# Altium PCB env_sensing_pcb.PcbDoc
Units mil, origin at the board's own origin, x right, y up, seen from the top; angles counter-clockwise.
Board outline 1381 x 1336 mil, 2 copper layers (Top Layer, Bottom Layer); 47 components, 37 nets, 205 pads, 131 vias.
Unrouted connection lines stored in the file: 1.
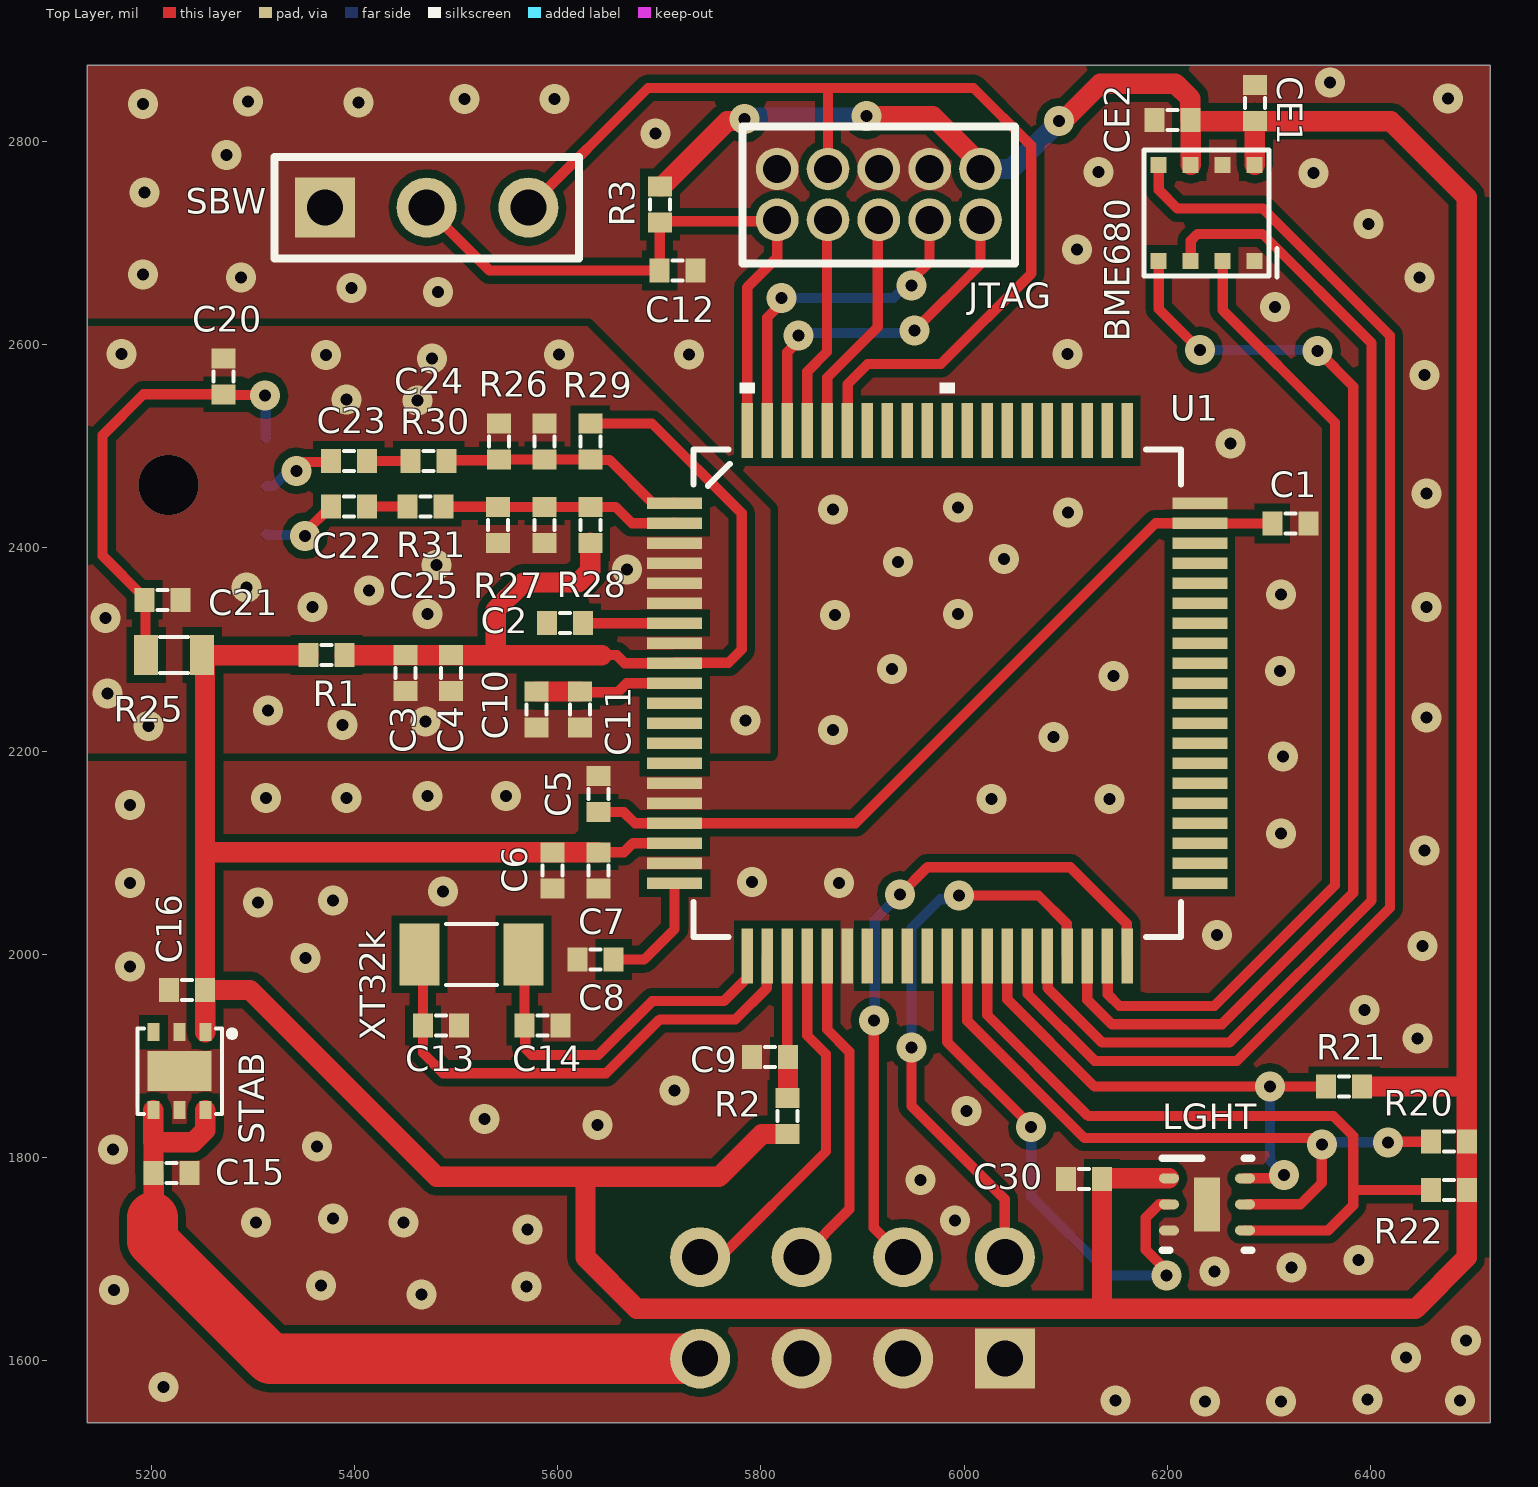
[diagram p0: Top Layer view]
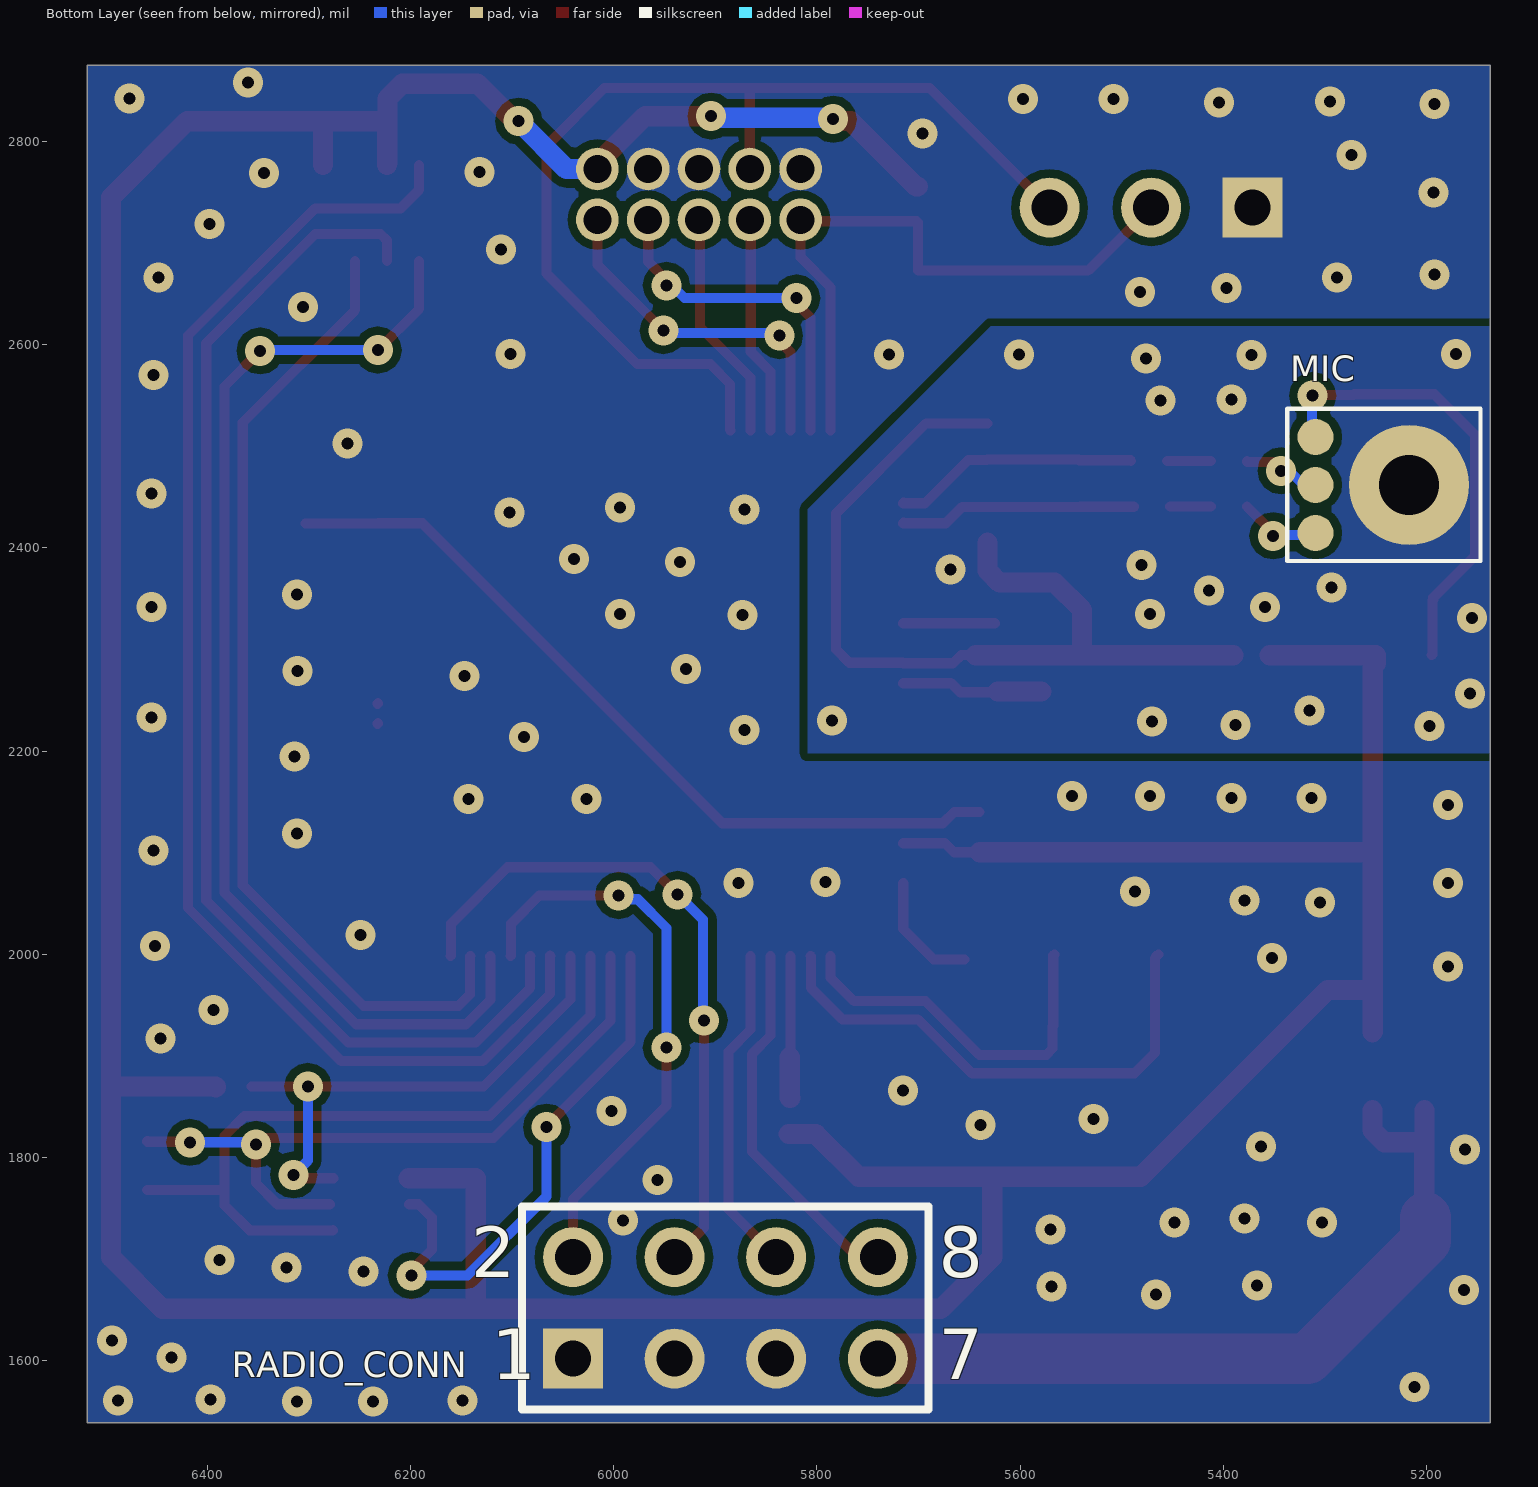
[diagram p1: Bottom Layer view, seen from below]

## Layer stack, top to bottom
Top Solder: solder mask 0.4, Solder Resist, Dk 3.5
Top Layer: signal copper 1.4
Dielectric 1: dielectric 12.6, FR-4, Dk 4.8
Bottom Layer: signal copper 1.4
Bottom Solder: solder mask 0.4, Solder Resist, Dk 3.5

## Board outline
5137,2875 6518,2875 6518,1539 5137,1539

## Design rules (kind name [scope] priority, off if disabled: settings)
Clearance [All] p1: gap=8 ignorepadtopadclearanceinfootprint=FALSE except(0: Arc-Hole Track-Hole SMDPad-Hole THPad-Hole Via-Hole Fill-Hole Poly-Hole Region-Hole Text-Hole)
PolygonConnect [All] p1: connectstyle=Direct reliefconductorwidth=10 reliefentries=4 polygonreliefangle="90 Angle" airgapwidth=10
RoomDefinition uC [InComponentClass('uC')] p1: confinementstyle=ConfineOut formatcopy=TRUE lockcomponents=FALSE outline 7236,2303 8561,2303 8561,3013 7236,3013
RoomDefinition mems [InComponentClass('mems')] p2: confinementstyle=ConfineOut formatcopy=TRUE lockcomponents=FALSE outline 6876,2743 7101,2743 7101,3013 6876,3013
RoutingVias [All] p1: holewidth=11.81 width=29.53 viastyle="Through Hole" minholewidth=11.81 minwidth=29.53 maxholewidth=28 maxwidth=50
SolderMaskExpansion [All] p1: expansion=4
Width [All] p1: maxlimit=50 minlimit=10 preferedwidth=10 minimp=50.000000 maximp=50.000000 favimp=50.000000
30 further rules are at their usual default settings.

## Classes and differential pairs
component class uC: C1 C2 C3 C4 C5 C6 C7 C8 C9 C10 C11 C12 C13 C14 C15 C16 LORA_CONN R1 R2 R3 RADIO_CONN SBW STAB U1 XT32k
component class mems: BME680 C20 C21 C22 C23 C24 C25 C30 CE1 CE2 LGHT MIC R20 R21 R22 R25 R26 R27 R28 R29 R30 R31

## Components (designator, comment, footprint, x,y, rotation, side; value= is the part's Value field where it differs from the comment)
BME680 "" BME680 6299.96,2791.65 r270 top
C1 "C" 402 6321,2424 r180 top
C2 "C" 402 5607,2325.91 r0 top
C3 "C" 402 5450,2276.72 r90 top
C4 "C" 402 5495,2276.72 r90 top
C5 "C" 402 5640,2157.72 r270 top
C6 "C" 402 5595,2082.72 r90 top
C7 "C" 402 5640,2082.72 r90 top
C8 "C" 402 5637.28,1995 r0 top
C9 "C" 402 5809,1899 r0 top
C10 "C" 402 5579,2241 r90 top
C11 "C" 402 5622,2241 r90 top
C12 "C" 402 5718,2673 r180 top
C13 "C" 402 5485,1930 r180 top
C14 "C" 402 5585,1930 r180 top
C15 "10u" 402 5220,1785 r180 top
C16 "10u" 402 5235,1965 r0 top
C20 "C" 402 5271,2569 r270 top
C21 "C" 402 5211,2349 r180 top
C22 "C" 402 5394.28,2440.72 r180 top
C23 "C" 402 5394.28,2485.72 r180 top
C24 "C" 402 5542,2504.72 r90 top
C25 "C" 402 5541.19,2422.72 r90 top
C30 "C" 402 6118,1779 r0 top
CE1 "C" 402 6286,2838 r270 top
CE2 "C" 402 6205,2821 r0 top
JTAG "Cortex Debug Connector" JTAG_HEADER 6016,2773 r180 top
LGHT "OPT3001DNPR" DNP0006A 6239,1754 r0 top value=Value
MIC "ICS-40730" ICS-40730 5217,2462 r180 bottom
R1 "R" 402 5372.28,2294.53 r0 top
R2 "R" 402 5826,1841 r90 top
R3 "R" 402 5700.6,2738 r90 top
R20 "R" 402 6477,1816 r0 top
R21 "R" 402 6374,1870 r0 top
R22 "R" 402 6477,1768 r0 top
R25 "R" 603 5222.44,2294.53 r180 top
R26 "R" 402 5587,2504.72 r90 top
R27 "R" 402 5587,2422.72 r90 top
R28 "R" 402 5632,2422.72 r90 top
R29 "R" 402 5632,2504.72 r90 top
R30 "R" 402 5473,2485.72 r0 top
R31 "R" 402 5470,2440.72 r0 top
RADIO_CONN "Header 4X2" HDR2X4 6040,1602 r180 bottom
SBW "" HDR1X3 5371,2735 r0 top
STAB "LP5912" WSON-6 5227.56,1885 r270 top
U1 "MSP430F6726_PN_8" PN80-L 5973.5,2257.01 r0 top value=Value
XT32k "CRYST_32k768" "CRYST 32.768 kHz" 5515,2000 r0 top

## Footprints (in the part's own frame and the unit in brackets; to place one, negate y for a bottom-side part, rotate by r counter-clockwise, add the part's x,y. Pads: shape width x height; smd on the part's side, far side on the other; paste and mask are expansions set on the pad)
402 [mm]
  rect 0.5x0.6 smd: 1(-0.45,0) 2(0.45,0)
  silkscreen extent -0.13,-0.25 0.13,0.25
603 [mm]
  rect 0.6x1 smd: 1(-0.7,0) 2(0.7,0)
  silkscreen extent -0.35,-0.45 0.35,0.45
BME680 [mm]
  rect 0.4x0.4 smd: 1(2.772,-0.355) 2(2.772,-1.155) 3(2.772,-1.955) 4(2.772,-2.755) 5(0.372,-2.755) 6(0.372,-1.955) 7(0.372,-1.155) 8(0.372,-0.355)
  silkscreen extent 0,-3.12 3.17,0.2
"CRYST 32.768 kHz" [mm]
  rect 1x1.55 smd: 1(-1.3,0) 2(1.3,0)
  silkscreen extent -0.64,-0.76 0.64,0.76
DNP0006A [mm]
  oval 0.5x0.25 smd paste-0.102 mask+0.051: 1(-0.95,0.65) 2(-0.95,0) 3(-0.95,-0.655) 4(0.95,-0.65) 5(0.95,0) 6(0.95,0.65)
  rect 0.65x1.35 smd paste-0.662 mask+0.051: 7(0,0)
  silkscreen extent -1.12,-1.15 1.12,1.15, body extent 0,0 0.25,0.25, height 0.25
HDR1X3 [mm] "Connector; Header; 3 Position"
  rect 1.5x1.5 hole 0.9: 1(0,0)
  round 1.5 hole 0.9: 2(2.54,0) 3(5.08,0)
  silkscreen extent -1.27,-1.27 6.35,1.27
HDR2X4 [mm] "Connector; Header; 4x2 Position"
  rect 1.5x1.5 hole 0.9: 1(0,0)
  round 1.5 hole 0.9: 2(0,2.54) 3(2.54,0) 4(2.54,2.54) 5(5.08,0) 6(5.08,2.54) 7(7.62,0) 8(7.62,2.54)
  silkscreen extent -1.27,-1.27 8.89,3.81
ICS-40730 [mm]
  round 0.9 smd: 1(-2.34,1.2) 2(-2.34,0) 3(-2.34,-1.2)
  round 3 smd: 4(0,0)
  silkscreen extent -3.05,-1.91 1.78,1.91
JTAG_HEADER [mm]
  round 1.067 hole 0.7: 1(0,0) 2(0,1.27) 3(1.27,0) 4(1.27,1.27) 5(2.54,0) 6(2.54,1.27) 7(3.81,0) 8(3.81,1.27) 9(5.08,0) 10(5.08,1.27)
  silkscreen extent -0.86,-1.07 5.94,2.36
PN80-L [mil]
  rect 54x11 smd: 1(-258.5,187.01) 2(-258.5,167.32) 3(-258.5,147.64) 4(-258.5,127.95) 5(-258.5,108.27) 6(-258.5,88.58) 7(-258.5,68.9) 8(-258.5,49.21) 9(-258.5,29.53) 10(-258.5,9.84) 11(-258.5,-9.84) 12(-258.5,-29.53) 13(-258.5,-49.21) 14(-258.5,-68.9) 15(-258.5,-88.58) 16(-258.5,-108.27) 17(-258.5,-127.95) 18(-258.5,-147.64) 19(-258.5,-167.32) 20(-258.5,-187.01) 41(258.5,-187.01) 42(258.5,-167.32) 43(258.5,-147.64) 44(258.5,-127.95) 45(258.5,-108.27) 46(258.5,-88.58) 47(258.5,-68.9) 48(258.5,-49.21) 49(258.5,-29.53) 50(258.5,-9.84) 51(258.5,9.84) 52(258.5,29.53) 53(258.5,49.21) 54(258.5,68.9) 55(258.5,88.58) 56(258.5,108.27) 57(258.5,127.95) 58(258.5,147.64) 59(258.5,167.32) 60(258.5,187.01)
  rect 11x54 smd: 21(-187.01,-258.5) 22(-167.32,-258.5) 23(-147.64,-258.5) 24(-127.95,-258.5) 25(-108.27,-258.5) 26(-88.58,-258.5) 27(-68.9,-258.5) 28(-49.21,-258.5) 29(-29.53,-258.5) 30(-9.84,-258.5) 31(9.84,-258.5) 32(29.53,-258.5) 33(49.21,-258.5) 34(68.9,-258.5) 35(88.58,-258.5) 36(108.27,-258.5) 37(127.95,-258.5) 38(147.64,-258.5) 39(167.32,-258.5) 40(187.01,-258.5) 61(187.01,258.5) 62(167.32,258.5) 63(147.64,258.5) 64(127.95,258.5) 65(108.27,258.5) 66(88.58,258.5) 67(68.9,258.5) 68(49.21,258.5) 69(29.53,258.5) 70(9.84,258.5) 71(-9.84,258.5) 72(-29.53,258.5) 73(-49.21,258.5) 74(-68.9,258.5) 75(-88.58,258.5) 76(-108.27,258.5) 77(-127.95,258.5) 78(-147.64,258.5) 79(-167.32,258.5) 80(-187.01,258.5)
  silkscreen extent -240,-240 240,306
WSON-6 [mm]
  rect 0.45x0.3 smd: 1(-0.975,0.65) 2(-0.975,0) 3(-0.975,-0.65) 4(0.975,-0.65) 5(0.975,0) 6(0.975,0.65)
  rect 1x1.6 smd: 7(0,0)
  silkscreen extent -1.07,-1.04 1.07,1.4

## Part data
BME680: library part BME680
C1 C2 C3 C4 C5 C6 C7 C8 C9 C10 C11 C12 C13 C14 C20 C21 C22 C23 C24 C25 C30 CE1 CE2: "Capacitor"
C15 C16: library part C, "Capacitor"
LGHT: "Imported", Manufacturer="Texas Instruments", PartNumber=OPT3001DNP, CompType=IC, MountType=SMT, PackageReference=DNP0006A, PIN_COUNT=7, RefDes=RefDes, RoHS=Y, TYPE=TYPE
R1 R2 R3 R20 R21 R22 R25 R26 R27 R28 R29 R30 R31: "Resistor"
RADIO_CONN: "Header, 4-Pin, Dual row", LatestRevisionDate=17-Jul-2002, LatestRevisionNote="Re-released for DXP Platform.", Publisher="Altium Limited"
SBW: library part "Header 3", "Header, 3-Pin", LatestRevisionDate=17-Jul-2002, LatestRevisionNote="Re-released for DXP Platform.", Publisher="Altium Limited"
U1: "Imported", Manufacturer="Texas Instruments", Manufacturer_Part_Number=msp430f6726_pn_80, PACKAGE_DESIGNATOR=PN, Datasheet_URL=http://www.ti.com/lit/gpn/MSP430F6726, FAMILY_NAME="6 Series with LCD", GENERIC_PART_NUMBER=MSP430F6726, INDUSTRY_STD_PKG_TYPE=LQFP, PIN_COUNT=80, RefDes=RefDes, TYPE=Type, Vendor="Texas Instruments"

## Via types
v1: diameter 29.53, hole 11.81, Top Layer to Bottom Layer, 130 vias
v2: diameter 59.06/25 (per signal layer), hole 59.06, Top Layer to Bottom Layer, tented both sides, 1 vias

## Nets (pads, with @x,y where several pads share a name; then routed paths per layer and width w, separated by ;. In a path a pad name is that pad's centre, name@x,y a point inside that pad or via, vN(x,y) a via of type N, cw(c..) or ccw(c..) an arc to the next point about the centre after c; other vN are vias at no path point)
AGND: C2.1 C3.1 C4.1 C10.1 C11.1 C20.1 C21.1 C24.2 C25.1 MIC.4 R26.2 R27.1 U1.3 U1.4 U1.5 U1.6 U1.8
  other v1: 5197,2225 5388,2226 5470,2229 5785,2230 5315,2240 5157,2257 5155,2331 5472,2335 5358.72,2342 5414,2358 5293.59,2361 5668.37,2379 5480.54,2383 5462,2545 5392,2546 5476,2586.72 5372,2590 5601,2590.28 5170.8,2591
  other v2: 5217,2462
AUXVCC3: C9.2 R2.2 U1.23 | length 143.8
  Top Layer w10: R2.2@5823.72,1861 R2.2 ; U1.23 5825.86,1899.54 C9.2@5826.56,1898.84
  Top Layer w20: R2.2 5826.4,1858.72 5826.56,1858.87 C9.2@5826.56,1898.84
AVCC: C3.2 C4.2 R1.2 R28.1 R29.2 U1.9 | length 900.4
  Top Layer w10: R29.2 5692.67,2522.43 5781,2434.1 5781,2300 5768.04,2287.04 5715.5,2287.04 U1.9 5665.99,2286.54 5658,2294.53 5643.47,2294.53
  Top Layer w20: R1.2 5539,2294.53 ; R28.1 5632,2377.72 5620.28,2366 5566,2366 5539,2339 5539,2294.53 ; 5643.47,2294.53 5539,2294.53
BME680_CSB: BME680.2 U1.39 | length 976
  Top Layer w10: U1.39 6141.32,1998.01 6141.32,1960.68 6152.86,1949.14 6246.14,1949.14 6365,2068 6365,2523.56 6254.5,2634.06 BME680.2
BME680_SCK: BME680.4 U1.38 | length 1138.1
  Top Layer w10: U1.38@6121.64,1998.01 U1.38 6121.14,1955.41 6145.4,1931.14 6253.6,1931.14 6383,2060.54 6383,2559 v1(6348,2594) ; BME680.4 6191.5,2635.29 v1(6232,2594.79)
  Bottom Layer w10: v1(6232,2594.79) 6347.21,2594.79 v1(6348,2594)
BME680_SDI: BME680.3 U1.36 | length 1224.5
  Top Layer w10: U1.36 6082.27,1998.01 6082.27,1966.81 6135.93,1913.14 6261.05,1913.14 6401,2053.09 6401,2601.64 6293.64,2709 6229.5,2709 6223,2702.5 BME680.3
BME680_SDO: BME680.5 U1.35 | length 1359.3
  Top Layer w10: U1.35@6062.58,1999.01 U1.35 6062.58,1998.01 6062.58,1961.04 6128.48,1895.14 6268.51,1895.14 6419,2045.63 6419,2609.09 6294.09,2734 6210,2734 6191.5,2752.5 BME680.5
GND: BME680.1 BME680.7 C1.1 C5.1 C6.1 C7.1 C8.1 C9.1 C12.1 C13.1 C14.1 C15.1 C16.1 C30.1 CE1.1 CE2.1 JTAG.3 JTAG.5 JTAG.9 LGHT.3 LGHT.7 RADIO_CONN.1 RADIO_CONN.3 RADIO_CONN.5 SBW.1 STAB.2 STAB.5 STAB.7 U1.15 U1.16 U1.19 U1.26 U1.60
  other v1: 6237,1560 6311.67,1560 6149,1561 6488,1561 6397,1562 5212,1574 6435,1603 6493.72,1620 5466,1665 5163,1669.59 5569,1673 5367,1674 6246.14,1688 6322,1692 6388,1699 5570,1729 5303,1736.21 5448,1736 5991,1738 5379,1739.85 5957,1778 5162,1808 5363,1811 5639,1832 5527.93,1838 6002.15,1846 5715,1866 6446,1917 6394,1945 5179,1988 5351.88,1996.54 6451.26,2008.25 6249,2019 5305,2051 5379,2053 5487,2062 5179,2070 5877,2070 5791.28,2071 6453,2102 6311.67,2119 5179,2147 6026.75,2153 6143,2153 5313,2154 5392,2154 5472,2156 5549,2156 6314,2194.88 6088,2213.98 5871,2221 6455,2233 6147,2274 6311,2279 5929,2281 5873,2334 5994,2335 6455,2342 6311.67,2354 5934.75,2386 6039,2389 6102.3,2434.99 5871,2438 5994,2439.83 6455,2453.41 6262.16,2503 6453,2570 5729,2590.28 6101.45,2591 6306,2637 5482,2652 5397,2656 5288,2666 6448,2666 5192,2669 6111,2694 6398,2719 5193.28,2750 6344.05,2769.21 6132,2770 5274,2787 5696,2808 5192,2837 5404,2838.35 5295,2839.51 5508,2842 5597,2842 6476.36,2842.44 6360,2858
LGHT_ADD: LGHT.2 U1.31 | length 529.5
  Top Layer w10: U1.31 5983.34,1913.66 6066,1831 v1(6066,1830) ; v1(6199,1684) 6199,1689 6178.76,1709.24 6178.76,1740.76 6192,1754 LGHT.2
  Bottom Layer w10: v1(6066,1830) 6066,1762 6144,1684 v1(6199,1684)
LGHT_INT: LGHT.5 R20.1 U1.32 | length 692.5
  Top Layer w10: U1.32 6003.03,1934.52 6118.31,1819.24 6344.05,1819.24 6351.14,1812.14 v1(6352,1813) 6352,1775 6331,1754 LGHT.5@6279.06,1754 ; v1(6417,1815) 6417.5,1815.5 6458.78,1815.5 R20.1 R20.1@6459.08,1816.2
  Bottom Layer w10: v1(6352,1813) 6354,1815 v1(6417,1815)
LGHT_SCL: LGHT.4 R22.1 U1.33 | length 729.2
  Top Layer w10: U1.33 6022.71,1940.29 6122.24,1840.76 6363.5,1840.76 6383,1821.26 6383,1768 ; LGHT.4 6276.48,1728.33 6358.33,1728.33 6383,1753 6383,1768 ; R22.1 6383,1768
LGHT_SDA: LGHT.6 R21.1 U1.34 | length 525.1
  Top Layer w10: U1.34 6042.4,1955.77 6128.16,1870 v1(6301,1870) R21.1 ; LGHT.6@6276.06,1779.59 LGHT.6@6276.14,1779.67 ; LGHT.6 6276.48,1779.67 6311.67,1779.67 v1(6315,1783)
  Bottom Layer w10: v1(6301,1870) 6301,1797 v1(6315,1783)
MIC_OUT+: C25.2 R27.2 R28.2 R31.2 U1.2 | length 234.8
  Top Layer w10: R31.2 5487.86,2440.57 5541.05,2440.57 C25.2 R27.2 R28.2 5656.9,2440.43 5673,2424.33 U1.2 U1.2@5714.5,2424.83
MIC_OUT-: C24.1 R26.1 R29.1 R30.2 U1.1 | length 243.3
  Top Layer w10: R30.2 5491.36,2486.36 5541.36,2486.36 C24.1 R26.1 R29.1 5632.48,2486.52 5651,2486.52 5693.5,2444.02 U1.1 U1.1@5714.5,2444.52
NetC2_2: C2.2 U1.7 | length 90.3
  Top Layer w10: C2.2 U1.7
NetC8_2: C8.2 U1.20 | length 117.4
  Top Layer w10: C8.2 5685,1995 5715,2025 U1.20
NetC20_2: C20.2 C21.2 MIC.1 R25.2 | length 453.7
  Top Layer w10: R25.2 5194.08,2295.33 5194.08,2348.2 C21.2 5193.28,2350.97 5152,2392.25 5152,2511 5192.28,2551.28 C20.2 5271.64,2550.64 5311.36,2550.64 v1(5312,2550)
  Bottom Layer w10: v1(5312,2550) 5312.56,2549.44 5312.56,2508.81 MIC.1@5313.13,2508.24
NetC22_1: C22.1 R31.1 | length 40.3
  Top Layer w10: C22.1 R31.1
NetC22_2: C22.2 MIC.3 | length 77.9
  Top Layer w10: v1(5351,2412) 5351,2415.15 C22.2
  Bottom Layer w10: MIC.3@5313.13,2413.76 5314,2412.88 5350.12,2412.88 v1(5351,2412)
NetC23_1: C23.1 R30.1 | length 43.3
  Top Layer w10: C23.1 R30.1
NetC23_2: C23.2 MIC.2 | length 74.3
  Top Layer w10: v1(5343,2476) 5351.58,2484.58 5376.57,2484.58 C23.2
  Bottom Layer w10: MIC.2@5313.13,2461 5320.01,2461 5331.27,2472.26 5339.26,2472.26 v1(5343,2476)
PS_VCC: C15.2 RADIO_CONN.7 STAB.4 STAB.6 | length 792.1
  Top Layer w20: 5201,1741 5202.28,1742.28 C15.2 ; STAB.4 5201.97,1815 5202.13,1815 ; C15.2@5202.13,1785 5202.13,1815 ; STAB.6 5253.15,1826.72 5241.43,1815 5202.13,1815
  Top Layer w50: 5201,1741 5201,1718.13 5317.13,1602 RADIO_CONN.7
RADIO_SPI_CLK: RADIO_CONN.2 U1.37 | length 596.6
  Top Layer w10: v1(5948,1908.21) 5948,1851 6040,1759 RADIO_CONN.2 ; v1(5995,2058) 6073.16,2058 6100.95,2030.21 6100.95,1999.01 U1.37
  Bottom Layer w10: v1(5948,1908.21) 5948,2026 5976.26,2054.26 5991.26,2054.26 v1(5995,2058) ; RADIO_CONN.2@6028.32,1682 6040,1693.68 RADIO_CONN.2
RADIO_SPI_MISO: RADIO_CONN.8 U1.24 | length 395.6
  Top Layer w10: RADIO_CONN.8 5760,1702 5864,1806 5864,1901.75 5845.55,1920.21 U1.24
  Bottom Layer w10: RADIO_CONN.8@5744.32,1682 RADIO_CONN.8@5744.32,1710.32
RADIO_SPI_MOSI: RADIO_CONN.6 U1.25 | length 340.7
  Top Layer w10: RADIO_CONN.6 5887,1749 5887,1904.21 5865.23,1925.98 U1.25
  Bottom Layer w10: RADIO_CONN.6@5828.32,1682 RADIO_CONN.6@5844,1682
RADIO_SPI_STE: RADIO_CONN.4 U1.40 | length 668.8
  Top Layer w10: v1(5911,1935) 5911,1731 RADIO_CONN.4 ; v1(5937,2059) 5963.76,2085.76 6104.45,2085.76 6160.01,2030.21 6160.01,1999.01 U1.40
  Bottom Layer w10: v1(5911,1935) 5912,1936 5912,2034 v1(5937,2059)
RST/SBWTDIO: C12.2 JTAG.10 R3.1 SBW.2 U1.80 | length 638.6
  Top Layer w10: SBW.2 5533,2673 C12.2 5700.44,2673.16 5700.44,2720.13 R3.1 5701.96,2721.64 5814.64,2721.64 JTAG.10 5816,2686 5786.49,2656.49 U1.80
TCK: JTAG.4 U1.79 | length 341.4
  Top Layer w10: U1.79 5806.18,2626.89 5820,2640.72 v1(5820,2646) ; v1(5948,2658.5) 5948,2663.78 5966,2681.78 JTAG.4
  Bottom Layer w10: v1(5820,2646) 5930.22,2646 5942.72,2658.5 v1(5948,2658.5)
TDI: JTAG.8 U1.77 | length 216.8
  Top Layer w10: U1.77 5845.55,2573.55 5865,2593 5865,2720 5864,2721 JTAG.8
TDO: JTAG.6 U1.76 | length 228.5
  Top Layer w10: U1.76 5865.23,2567.78 5915,2617.54 5915,2722 JTAG.6
TEST/SBWTCK: JTAG.7 SBW.3 U1.75 | length 1044.7
  Top Layer w10: SBW.3 5688.76,2852.76 5866,2852.76 ; JTAG.7 5866,2852.76 ; U1.75 5885.42,2516.01 5885.42,2561.42 5905,2581 5977,2581 6066,2670 6066,2796 6009.24,2852.76 5866,2852.76
TMS: JTAG.2 U1.78 | length 350.2
  Top Layer w10: U1.78 5825.86,2592.67 5837,2603.81 v1(5837,2609.09) ; v1(5951,2614) 6016,2679 JTAG.2
  Bottom Layer w10: v1(5837,2609.09) 5839.45,2611.55 5948.55,2611.55 v1(5951,2614)
VASYS: C10.2 C11.2 U1.10 | length 139.7
  Top Layer w10: C11.2@5622,2258 5659,2258 5667.85,2266.85 U1.10
  Top Layer w20: C10.2 C11.2
VCC: BME680.6 BME680.8 C6.2 C7.2 C16.2 C30.2 CE1.2 CE2.2 JTAG.1 LGHT.1 R1.1 R2.1 R3.2 R20.2 R21.2 R22.2 R25.1 STAB.1 U1.18 | length 4970.9
  Top Layer w10: C7.2 5665,2100.43 5673.94,2109.37 U1.18
  Top Layer w20: STAB.1 5252.87,1923.66 5252.87,1964.84 C16.2 ; R1.1 R25.1 5250,2286.65 5252.72,2283.94 5252.72,2100 ; C7.2 C6.2 5253.15,2100.43 5252.72,2100 ; R3.2 5702.25,2755.72 5766.71,2820.18 5782.18,2820.18 v1(5784,2822) ; R2.1@5827.65,1823.28 R2.1 5825.84,1823.13 5800.86,1823.13 5758.74,1781 5626,1781 ; v1(5904,2825) 5969.16,2825 6016,2778.16 JTAG.1 ; v1(6093.42,2820) 6097,2820 6134,2857 6208,2857 6222.56,2842.44 6222.56,2821.16 CE2.2 6222.87,2820.84 CE2.2@6222.87,2820 ; LGHT.1 6135.87,1779.59 6135.72,1779.43 C30.2 6135.72,1651.39 6135.87,1651.24 ; BME680.6 6223,2779.06 6222.87,2779.19 CE2.2@6222.87,2820 ; BME680.8 CE1.2@6285.99,2820 ; CE1.2 CE1.2@6285.99,2820 ; R21.2@6391.87,1869 6391.72,1869.16 R21.2 6493.72,1870 6494.72,1869 ; C16.2 5297,1965 5481,1781 5626,1781 ; C16.2 5252.72,2100 ; 5626,1781 5627.28,1779.72 5627.28,1701.72 5677.76,1651.24 6135.87,1651.24 ; 6135.87,1651.24 6444.24,1651.24 6494.72,1701.72 R22.2 R20.2 6494.72,1869 ; CE2.2@6222.87,2820 CE1.2@6285.99,2820 ; CE1.2@6285.99,2820 6420,2820 6494.72,2745.28 6494.72,1869
  Bottom Layer w20: v1(5784,2822) 5785.5,2823.5 5902.5,2823.5 v1(5904,2825) ; JTAG.1 6046.42,2773 v1(6093.42,2820)
VDSYS: C1.2 C5.2 U1.17 U1.59 | length 790.3
  Top Layer w10: C5.2 5665,2140 5675.94,2129.06 U1.17 5893.06,2129.06 6188.33,2424.33 U1.59 6232.17,2424.17 6303.12,2424.17 C1.2
XIN: C14.2 U1.21 XT32k.2 | length 367.5
  Top Layer w10: XT32k.2 5567.28,1998.9 C14.2 5568,1929.28 5568,1907.28 5574.28,1901 5640,1901 5693,1954 5763.48,1954 5786.49,1977.01 U1.21
XOUT: C13.2 U1.22 XT32k.1 | length 511.7
  Top Layer w10: XT32k.1 5467.28,1996.54 C13.2 5467.28,1903 5487.28,1883 5647.46,1883 5700.46,1936 5774.87,1936 5805.68,1966.81 5805.68,1998.01 U1.22
pads on no net: STAB.3 U1.11 U1.12 U1.13 U1.14 U1.27 U1.28 U1.29 U1.30 U1.41 U1.42 U1.43 U1.44 U1.45 U1.46 U1.47 U1.48 U1.49 U1.50 U1.51 U1.52 U1.53 U1.54 U1.55 U1.56 U1.57 U1.58 U1.61 U1.62 U1.63 U1.64 U1.65 U1.66 U1.67 U1.68 U1.69 U1.70 U1.71 U1.72 U1.73 U1.74
copper on no net: | length 1.4
  Top Layer w10: 6232,2227.48 6232.5,2226.98 ; 6232,2247.17 6232.5,2246.67

## Polygon pours and split planes (outlines as drawn)
GND on Top Layer "Bottom Layer-No Net" (solid, remove dead copper, pour order 6): 5137,2875 6518,2875 6518,1539 5137,1539
AGND on Top Layer "Top Layer-AGND" (solid, remove dead copper, pour order 0): 5137,2618 5629,2618 5809,2438 5809,2198 5371,2198 5137,2198
GND on Bottom Layer "Bottom Layer-No Net" (solid, remove dead copper, pour order 8): 5137,2875 6518,2875 6518,1539 5137,1539
AGND on Bottom Layer "Bottom Layer-No Net" (solid, remove dead copper, pour order 4): 5137,2618 5629,2618 5809,2438 5809,2198 5137,2198

## Silkscreen, mask and mechanical layers (free items; w line width, h text height)
Bottom Solder:
  rectangle: 5224,2172 5279,2236
Mechanical 1:
  lines w10: 5136,1539 5136,2876 6518,2876 6518,1539 5136,1539

## Text inside footprints (layer, text, board x,y; h text height)
RADIO_CONN: Bottom Overlay "2" at 6140,1682 h50; Bottom Overlay "1" at 6120,1582 h50; Bottom Overlay "7" at 5680,1582 h50; Bottom Overlay "8" at 5680,1682 h50